# EAGLE board wifly-adapter-board (EAGLE 5.10)
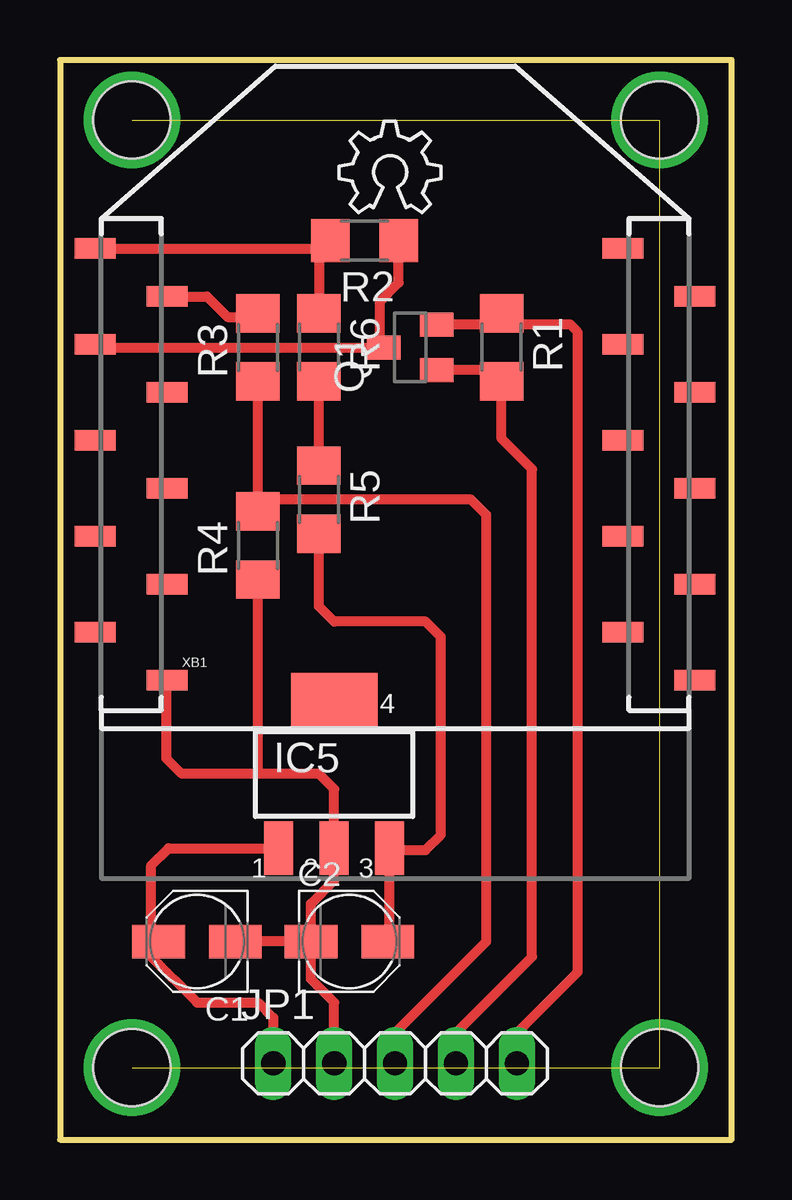
[diagram p0: board, top side]

Size 28 x 45 mm. Coordinates in mm from the lower left corner, seen from the top.
Outline: 0,0 28,0 28,45 0,45 0,0
Copper layers (1*16): Top 0.035mm / dielectric 1.5mm / Bottom 0.035mm
Design rules "default": minimum track width 10mil, minimum drill 24mil, track to track 8mil, track to pad 8mil, pad to pad 8mil, via to via 8mil, smd to smd 8mil, copper to edge 40mil, drill to drill 8mil, minimum pad ring 10mil, minimum via ring 8mil, stop-mask expansion 4mil, vias tented up to drill 0mil, thermal gap 10mil
Holes 3.2 mm at 3,3 25,3 3,42.5 25,42.5

## Footprints (pad centres in the part's own frame; a part is rotated, then mirrored left to right if it is on the bottom)
PANASONIC_B = smd 2.2 x 1.4: + 1.6,0; - -1.6,0
SOT223 = smd 1.219 x 2.235: 1 -2.311,-3.099; 2 0,-3.099; 3 2.311,-3.099 | smd 3.6 x 2.2: 4 0,3.099
1X05 = drill 1.016 long: 1 -5.08,0; 2 -2.54,0; 3 0,0; 4 2.54,0; 5 5.08,0
SOT23 = smd 1 x 1.4: 1 -0.95,-1.1; 2 0.95,-1.1; 3 0,1.1
R1206 = smd 1.6 x 1.803: 1 -1.422,0; 2 1.422,0
XBEE-PRO-SMD = smd 1.7 x 0.85: 1 -12.5,20; 2 -9.5,18; 3 -12.5,16; 4 -9.5,14; 5 -12.5,12; 6 -9.5,10; 7 -12.5,8; 8 -9.5,6; 9 -12.5,4; 10 -9.5,2; 11 12.5,2; 12 9.5,4; 13 12.5,6; 14 9.5,8; 15 12.5,10; 16 9.5,12; 17 12.5,14; 18 9.5,16; 19 12.5,18; 20 9.5,20

## Placement (x,y rotation side)
C1  1u  [PANASONIC_B]  5.71,8.26 180 top
C2  1u  [PANASONIC_B]  12.06,8.26 0 top
IC5  MCP1702-3302  [SOT223]  11.43,15.24 0 top
JP1  [1X05]  13.97,3.17 0 top
LOGO1  OSHW_LOGO_6MILX0150-NT  [OSHW_6X150_NOTEXT]  11.63,38.63 0 top
Q1  BSS138  [SOT23]  14.61,33.02 90 top
R1  10k  [R1206]  18.41,33.02 270 top
R2  10k  [R1206]  12.7,37.47 180 top
R3  10k  [R1206]  8.26,33.02 90 top
R4  10k  [R1206]  8.26,24.77 90 top
R5  0  [R1206]  10.79,26.67 270 top
R6  0  [R1206]  10.79,33.02 270 top
XB1  XBEE-1B3  [XBEE-PRO-SMD]  13.97,17.14 0 top

## Library data of the parts
C1 C2 R1-R6 = rcl
IC5 = linear
JP1 = pinhead
LOGO1 = OSHW
Q1 = transistor-small-signal
XB1 = grapelabs

## Nets
1V8: JP1.4 Q1.1 R1.2
3V3: R2.2 R6.1 XB1.1
5V: C1.+ IC5.1 JP1.1
DIN: Q1.3 R2.1 XB1.3
DOUT: R3.2 XB1.2
GND: C1.- C2.- IC5.2 JP1.2 R4.1 XB1.10
N$1: C2.+ IC5.3 R5.2
N$2: R5.1 R6.2
UART_RX: JP1.3 R3.1 R4.2
UART_TX: JP1.5 Q1.2 R1.1

## Tracks (layer width: path | path; a pad name or v marks a point on that pad's centre or on a via)
1V8
  Top 0.406: Q1.1 17.94,32.07 R1.2 | JP1.4 16.51,4.45 19.68,7.62 19.68,27.94 18.41,29.21 R1.2 | R1.2 18.57,31.75
3V3
  Top 0.406: XB1.1 10.79,37.15 | 10.79,37.15 10.96,37.15 R2.2 | 10.79,37.15 R6.1
5V
  Top 0.406: JP1.1 8.89,5.08 8.26,5.71 5.71,5.71 3.81,7.62 3.81,7.95 C1.+ 3.81,8.56 3.81,11.43 4.52,12.14 IC5.1
DIN
  Top 0.406: XB1.3 1.59,33.02 Q1.3 13.34,33.19 13.34,34.92 14.12,35.71 R2.1
DOUT
  Top 0.406: XB1.2 6.13,35.15 6.99,34.29 8.1,34.29 R3.2
GND
  Top 0.406: C2.- C1.- | JP1.2 11.43,5.71 10.46,6.68 C2.- | C2.- 10.46,9.83 11.43,10.79 IC5.2 11.43,14.61 10.79,15.24 8.26,15.24 | 8.26,15.24 5.08,15.24 4.45,15.88 4.45,19.12 XB1.10 | 8.26,15.24 R4.1
N$1
  Top 0.406: C2.+ 13.74,8.33 IC5.3 13.82,12.06 15.24,12.06 15.88,12.7 15.88,20.95 15.24,21.59 11.43,21.59 10.79,22.23 R5.2
N$2
  Top 0.406: R5.1 R6.2
N$25  (via drill 3 pad 2)  (3 unrouted)
  other vias: 25,3 3,3 3,42.5 25,42.5
N$45  (via drill 1 pad 1.27)  (3 unrouted)
  other vias: 25,3 3,42.5 3,3 25,42.5
UART_RX
  Top 0.406: R3.1 R4.2 8.74,26.67 17.14,26.67 17.78,26.04 17.78,8.26 13.97,4.45 JP1.3
UART_TX
  Top 0.406: 17.94,33.97 Q1.2 | 17.94,33.97 R1.1 | 17.94,33.97 21.27,33.97 21.59,33.66 21.59,6.99 19.05,4.45 JP1.5